# Altium PCB PCB1.PcbDoc
Units mil, origin at the board's own origin, x right, y up, seen from the top; angles counter-clockwise.
Board outline 3310.03 x 3160.01 mil, 2 copper layers (Top Layer, Bottom Layer); 14 components, 68 nets, 167 pads, 0 vias.
Unrouted connection lines stored in the file: 27.
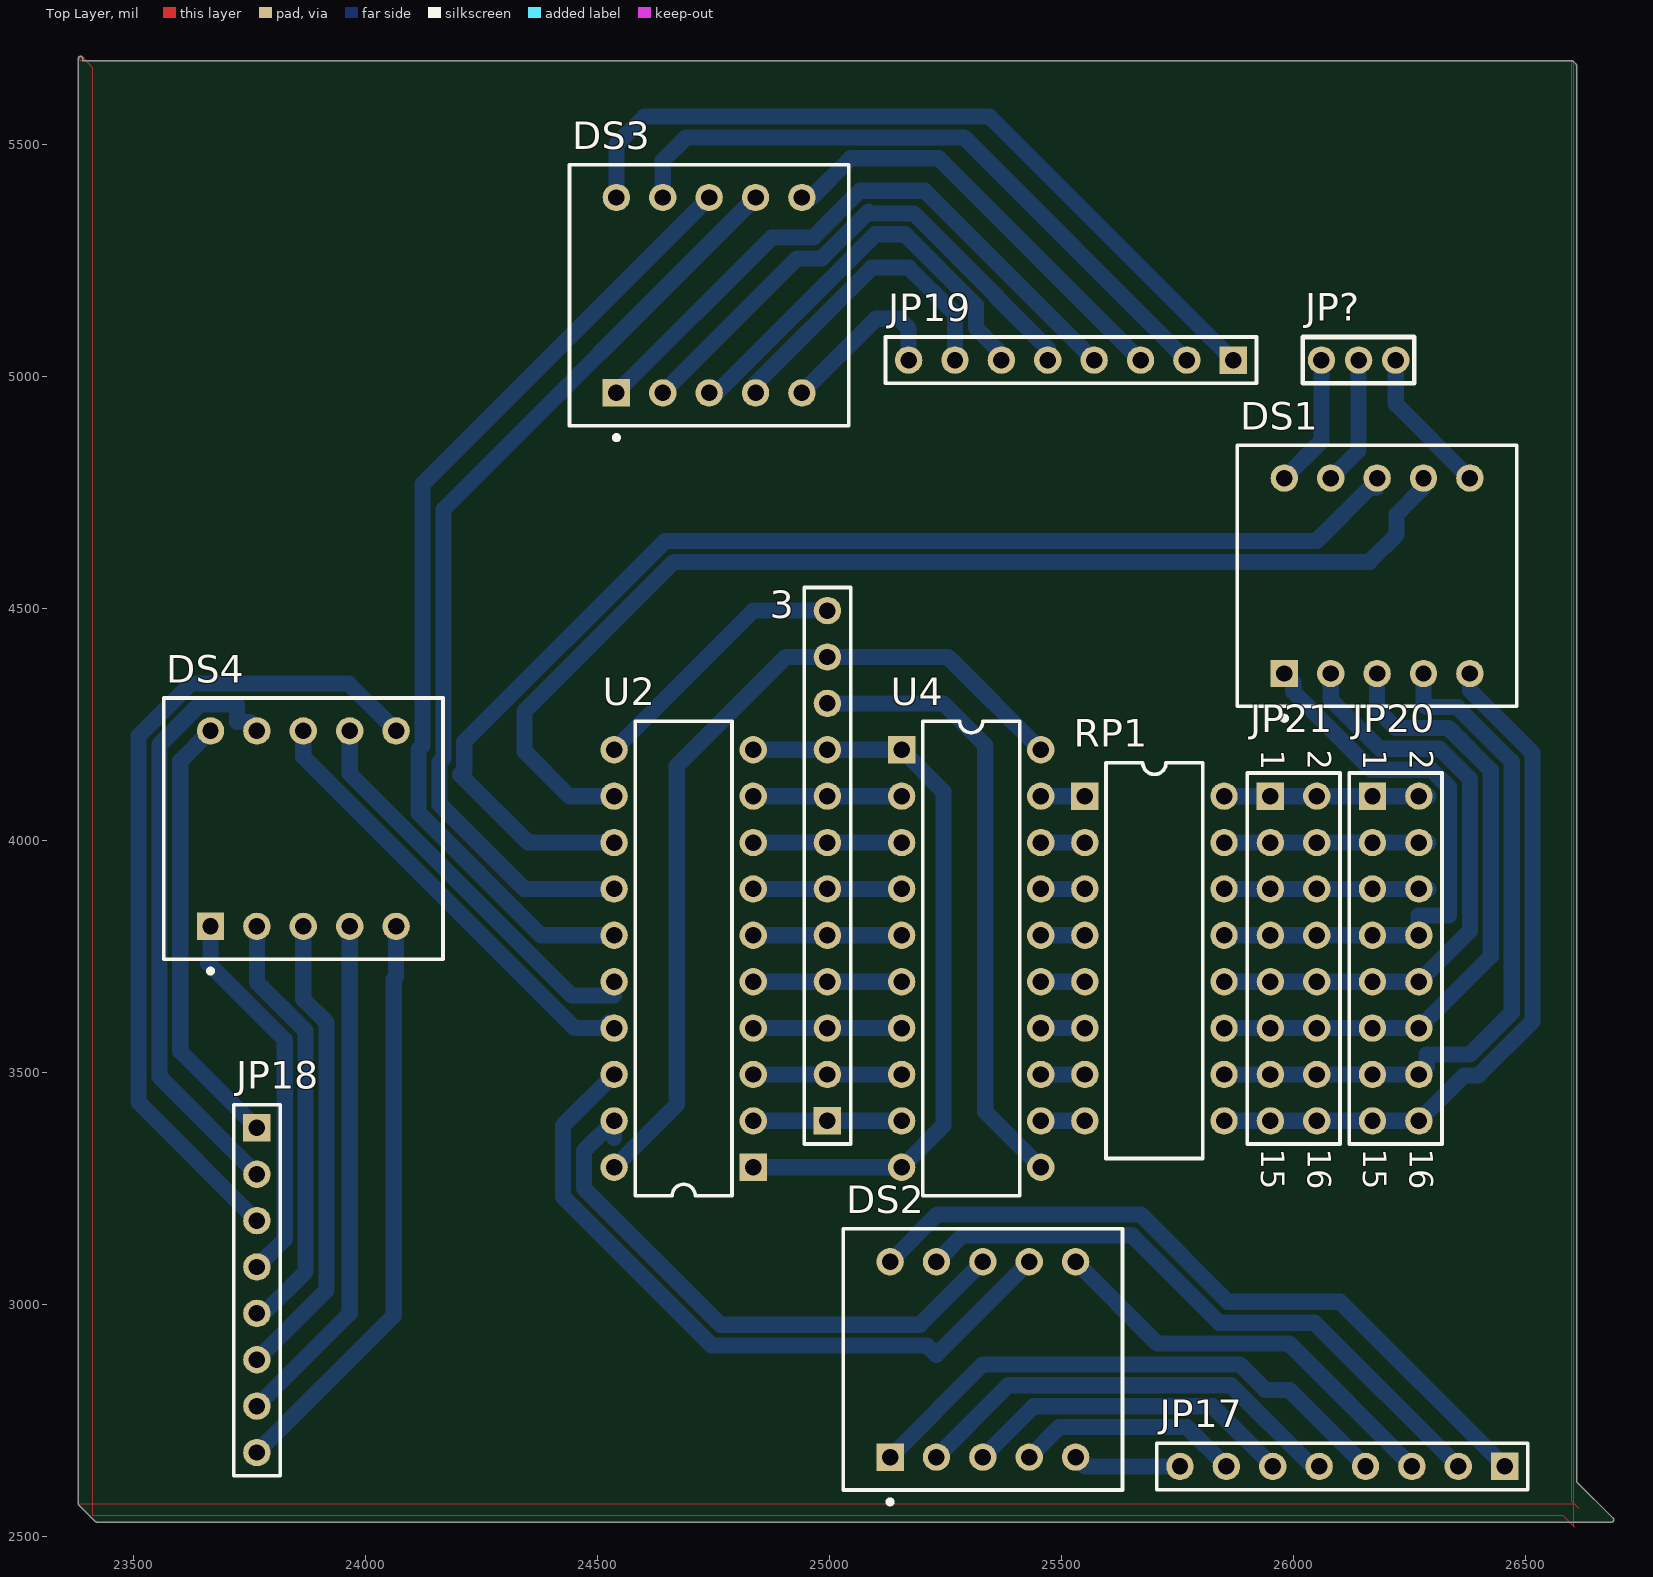
[diagram p0: Top Layer view]
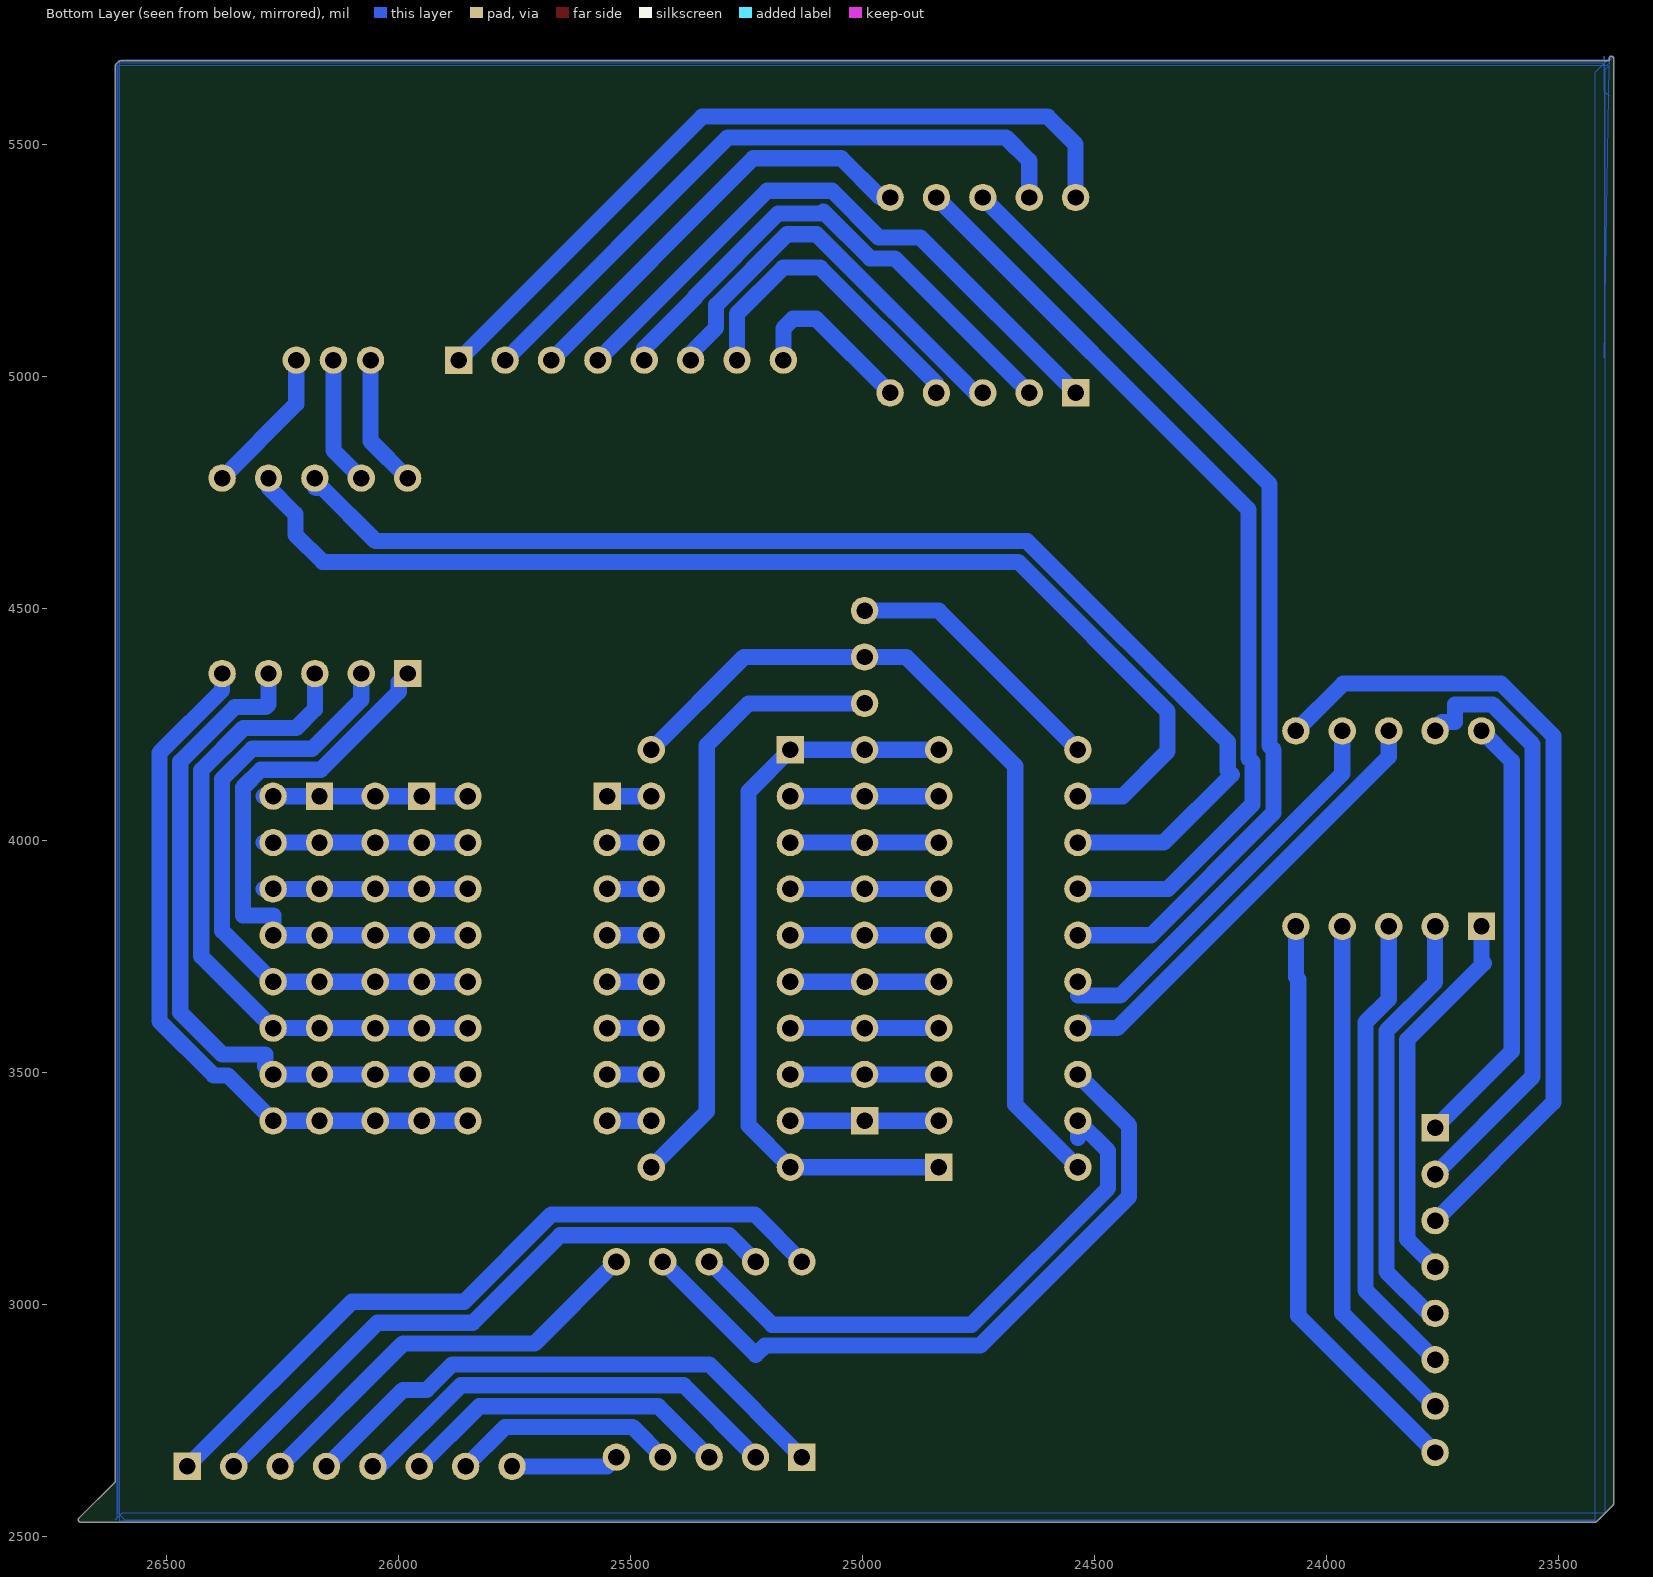
[diagram p1: Bottom Layer view, seen from below]

## Layer stack, top to bottom
Top Solder: solder mask 0.4, Solder Resist, Dk 3.5
Top Layer: signal copper 1.4
Dielectric 1: dielectric 12.6, FR-4, Dk 4.8
Bottom Layer: signal copper 1.4
Bottom Solder: solder mask 0.4, Solder Resist, Dk 3.5

## Board outline
23379.99,2570 ccw(c23385,2570) 23381.47,2566.44 23381.45,2566.45 23416.45,2531.45 23416.44,2531.47 ccw(c23420,2535) 23420,2529.99 26685,2529.99 ccw(c26685,2535) 26690.01,2535 ccw(c26685,2535) 26688.53,2538.56 26688.55,2538.55 26610.01,2617.08 26610.01,5670 ccw(c26605,5670) 26608.53,5673.56 26608.55,5673.55 26603.55,5678.55 26603.56,5678.53 ccw(c26600,5675) 26600,5680.02 23390.01,5680.02 23390.01,5685 ccw(c23385,5685) 23379.99,5685

## Design rules (kind name [scope] priority, off if disabled: settings)
Clearance [All] p1: gap=10
PolygonConnect [All] p1: connectstyle=Relief reliefconductorwidth=10 reliefentries=4 polygonreliefangle="90 Angle" airgapwidth=10
RoutingVias [All] p1: holewidth=28 width=50 viastyle="Through Hole" minholewidth=28 minwidth=50 maxholewidth=28 maxwidth=50
SolderMaskExpansion [All] p1: expansion=4
Width [All] p1: maxlimit=50 minlimit=35 preferedwidth=40
30 further rules are at their usual default settings.

## Components (designator, comment, footprint, x,y, rotation, side; value= is the part's Value field where it differs from the comment)
3 "HEADER 12" HDR1X12 24995,3395 r90 top
DS1 "HDSM-577G" HDSM-577 26180,4570 r0 top
DS2 "HDSM-577G" HDSM-577 25330,2880.63 r0 top
DS3 "HDSM-577G" HDSM-577 24740,5175 r0 top
DS4 "HDSM-577G" HDSM-577 23865,4025 r0 top
JP17 "HEADER 8" HDR1X8 26455,2650 r180 top
JP18 "HEADER 8" HDR1X8 23765,3380 r270 top
JP19 "HEADER 8" HDR1X8 25870,5035 r180 top
JP20 "HEADER 8X2" HDR2X8 26170,4095 r270 top
JP21 "HEADER 8X2" HDR2X8 25950,4095 r270 top
JP? "HEADER 3" "Header3 80mil" 26060,5035 r0 top
RP1 "RESPACK4" DIP16 25700,3745 r270 top
U2 "74HC573" DIP-20 24685,3745 r90 top
U4 "74HC573" DIP-20 25305,3745 r270 top

## Footprints (in the part's own frame and the unit in brackets; to place one, negate y for a bottom-side part, rotate by r counter-clockwise, add the part's x,y. Pads: shape width x height; smd on the part's side, far side on the other; paste and mask are expansions set on the pad)
DIP16 [mm]
  rect 1.5x1.5 hole 0.9: 1(-8.89,-3.81)
  round 1.5 hole 0.9: 2(-6.35,-3.81) 3(-3.81,-3.81) 4(-1.27,-3.81) 5(1.27,-3.81) 6(3.81,-3.81) 7(6.35,-3.81) 8(8.89,-3.81) 9(8.89,3.81) 10(6.35,3.81) 11(3.81,3.81) 12(1.27,3.81) 13(-1.27,3.81) 14(-3.81,3.81) 15(-6.35,3.81) 16(-8.89,3.81)
  silkscreen extent -10.72,-2.65 10.95,2.65
DIP-20 [mm]
  rect 1.5x1.5 hole 0.9: 1(-11.43,-3.81)
  round 1.5 hole 0.9: 2(-8.89,-3.81) 3(-6.35,-3.81) 4(-3.81,-3.81) 5(-1.27,-3.81) 6(1.27,-3.81) 7(3.81,-3.81) 8(6.35,-3.81) 9(8.89,-3.81) 10(11.43,-3.81) 11(11.43,3.81) 12(8.89,3.81) 13(6.35,3.81) 14(3.81,3.81) 15(1.27,3.81) 16(-1.27,3.81) 17(-3.81,3.81) 18(-6.35,3.81) 19(-8.89,3.81) 20(-11.43,3.81)
  silkscreen extent -13,-2.65 13,2.65
HDR1X8 [mm] "Connector; Header; 8 Position"
  rect 1.5x1.5 hole 0.9: 1(0,0)
  round 1.5 hole 0.9: 2(2.54,0) 3(5.08,0) 4(7.62,0) 5(10.16,0) 6(12.7,0) 7(15.24,0) 8(17.78,0)
  silkscreen extent -1.27,-1.27 19.05,1.27
HDR1X12 [mm] "Connector; Header; 12 Position"
  rect 1.5x1.5 hole 0.9: 1(0,0)
  round 1.5 hole 0.9: 2(2.54,0) 3(5.08,0) 4(7.62,0) 5(10.16,0) 6(12.7,0) 7(15.24,0) 8(17.78,0) 9(20.32,0) 10(22.86,0) 11(25.4,0) 12(27.94,0)
  silkscreen extent -1.27,-1.27 29.21,1.27
HDR2X8 [mm] "Connector; Header; 8x2 Position"
  rect 1.5x1.5 hole 0.9: 1(0,0)
  round 1.5 hole 0.9: 2(0,2.54) 3(2.54,0) 4(2.54,2.54) 5(5.08,0) 6(5.08,2.54) 7(7.62,0) 8(7.62,2.54) 9(10.16,0) 10(10.16,2.54) 11(12.7,0) 12(12.7,2.54) 13(15.24,0) 14(15.24,2.54) 15(17.78,0) 16(17.78,2.54)
  silkscreen extent -1.27,-1.27 19.05,3.81
HDSM-577 [mm] "LED, 7-Segment Display, 9.2 mm, Dual Digit; 10 Leads; Row Space 10.7 mm; Pitch 2.54 mm"
  rect 1.5x1.5 hole 0.9: 1(-5.08,-5.35)
  round 1.5 hole 0.9: 2(-2.54,-5.35) 3(0,-5.35) 4(2.54,-5.35) 5(5.08,-5.35) 6(5.08,5.35) 7(2.54,5.35) 8(0,5.35) 9(-2.54,5.35) 10(-5.08,5.35)
  silkscreen extent -7.65,-7.92 7.65,7.15
"Header3 80mil" [mm]
  round 1.5 hole 0.9: 1(0,0) 2(2.032,0) 3(4.064,0)
  silkscreen extent -1.02,-1.27 5.08,1.27

## Part data
3: "12 Pin Header"
DS1 DS2 DS3 DS4: "9.2 mm Green 7-Segment Display: 2-Digit, RH DP"
JP17 JP18 JP19: "8 Pin Header"
RP1: library part 8单路阻排

## Nets (pads, with @x,y where several pads share a name; then routed paths per layer and width w, separated by ;. In a path a pad name is that pad's centre, name@x,y a point inside that pad or via, vN(x,y) a via of type N, cw(c..) or ccw(c..) an arc to the next point about the centre after c; other vN are vias at no path point)
A: DS1.10 DS2.10 DS3.10 DS4.10 JP17.1 JP18.1 JP19.1 JP20.1 JP20.2 JP21.1 JP21.2 JP?.1 RP1.16 | length 4957.4
  Bottom Layer w35: DS4.10 23600,4170.63 23600,3545 JP18.1 ; DS3.10 24540,5500 24600,5560 25345,5560 JP19.1 ; DS2.10 25232.03,3193.29 25669.96,3193.29 25858.25,3005 26100,3005 JP17.1 ; RP1.16 JP20.2@26290,4095 ; DS1.10 26060,4860.63 JP?.1
B: DS1.9 DS2.9 DS3.9 DS4.9 JP17.2 JP18.2 JP19.2 JP20.3 JP20.4 JP21.3 JP21.4 JP?.2 RP1.15 | length 4810.4
  Bottom Layer w35: JP18.2 23555,3490 23555,4206.28 23641.38,4292.66 23722.03,4292.66 23722.03,4255 23750,4255 23765,4240 DS4.9 ; DS3.9 24640,5465 24690,5515 25290,5515 JP19.2 ; DS2.9 25287.03,3148.29 25651.32,3148.29 25839.61,2960 26045,2960 JP17.2 ; RP1.15 JP20.4@26290,3995 ; DS1.9 26140,4840.63 JP?.2
BL1: 
BL2: 
BL3: 
BL4: 
BL5: 
BL6: 
BL7: 
BL8: 
C: DS1.1 DS2.1 DS3.1 DS4.1 JP17.4 JP18.4 JP19.4 JP20.7 JP20.8 JP21.7 JP21.8 RP1.13 | length 4855.6
  Bottom Layer w35: DS4.1 23665,3740 23660,3735 23825,3570 23825,3140 JP18.4 ; DS3.1 24875,5299.37 24964.37,5299.37 25065,5400 25205,5400 JP19.4 ; DS2.1@25130,2670.63 DS2.1 25330,2870 25883.64,2870 25938.64,2815 25990,2815 JP17.4 ; JP21.7 RP1.13 ; JP21.7@25960,3795 RP1.13 ; DS1.1@25999.37,4340 25999.37,4320 26167.34,4152.03 26296.61,4152.03 26335,4113.64 26335,3837.97 26270,3837.97 JP20.8 JP20.7 JP21.8@26060,3795 ; JP21.8 JP21.8@26060,3795 ; RP1.13 JP21.8@26060,3795
D: DS1.3 DS2.3 DS3.3 DS4.3 JP17.6 JP18.6 JP19.6 JP20.11 JP20.12 JP21.11 JP21.12 RP1.11 | length 4385
  Bottom Layer w35: JP18.6 23915,3030 23915,3607.28 23865,3657.28 DS4.3 ; DS3.3 24756.65,4964.37 25098.64,5306.36 25162.28,5306.36 25315,5153.64 25315,5105 25370,5050 JP19.6 ; DS2.3 25440,2780 25825,2780 JP17.6 ; JP21.11@25960,3595 RP1.11 ; JP21.12@26060,3595 RP1.11 ; DS1.3@26175,4360 26175.63,4359.37 DS1.3 ; DS1.3@26180,4339.37 26180,4282.03 26220,4242.03 26333.89,4242.03 26425,4150.92 26425,3750 JP20.12 RP1.11
D0: 3.1 U2.2 U4.9 | length 320
  Bottom Layer w35: U2.2 3.1 U4.9
D1: 3.2 U2.3 U4.8 | length 320
  Bottom Layer w35: U2.3 3.2 U4.8
D2: 3.3 U2.4 U4.7 | length 320
  Bottom Layer w35: U2.4 3.3 U4.7
D3: 3.4 U2.5 U4.6 | length 320
  Bottom Layer w35: U2.5 3.4 U4.6
D4: 3.5 U2.6 U4.5 | length 320
  Bottom Layer w35: U2.6 3.5 U4.5
D5: 3.6 U2.7 U4.4 | length 320
  Bottom Layer w35: U2.7 3.6 U4.4
D6: 3.7 U2.8 U4.3 | length 320
  Bottom Layer w35: U2.8 3.7 U4.3
D7: 3.8 U2.9 U4.2 | length 320
  Bottom Layer w35: U2.9 3.8 U4.2
DU: 3.10 U4.11 | length 1337
  Bottom Layer w35: 3.10 25245,4295 25335,4205 25335,3415 U4.11
E: DS1.2 DS2.2 DS3.2 DS4.2 JP17.5 JP18.5 JP19.5 JP20.9 JP20.10 JP21.9 JP21.10 RP1.12 | length 4666.5
  Bottom Layer w35: JP18.5 23780,2980 23870,3070 23870,3588.64 23765,3693.64 DS4.2 ; DS3.2 24930,5254.37 24983.01,5254.37 25083.64,5355 25087.28,5351.36 25180.92,5351.36 25360,5172.28 25360,5170 25470,5060 JP19.5 ; DS2.2 25385,2825 25865,2825 26040,2650 JP17.5 ; JP21.9@25960,3695 RP1.12 ; JP21.10@26060,3695 RP1.12 ; DS1.2@26080,4339.37 26080,4303.01 26185.98,4197.03 26315.25,4197.03 26380,4132.28 26380,3805 JP20.10 RP1.12 ; DS1.2@26080,4355 DS1.2
EA: 3.11 U2.20 U4.20 | length 1886.1
  Bottom Layer w35: U2.20 24670,3430 24670,4160 24905,4395 3.11 25255,4395 U4.20
F: DS1.6 DS2.6 DS3.6 DS4.6 JP17.3 JP18.3 JP19.3 JP20.5 JP20.6 JP21.5 JP21.6 JP?.3 RP1.14 | length 4408.1
  Bottom Layer w35: JP18.3 23510,3435 23510,4224.92 23622.74,4337.66 23962.97,4337.66 DS4.6 ; DS3.6 24960.63,5385.63 25045,5470 25235,5470 JP19.3 ; DS2.6 25706.26,2915 25990,2915 JP17.3 ; RP1.14 JP20.6@26290,3895 ; JP?.3 26220,4940.63 DS1.6
G: DS1.4 DS2.4 DS3.4 DS4.4 JP17.7 JP18.7 JP19.7 JP20.13 JP20.14 JP21.13 JP21.14 RP1.10 | length 4158.2
  Bottom Layer w35: JP18.7 23965,2980 DS4.4 ; DS3.4 24840,4984.08 25090.46,5234.54 25170.46,5234.54 25270,5135 JP19.7 ; DS2.4 25495,2735 25770,2735 JP17.7 ; JP21.13@25960,3495 RP1.10 ; JP21.14@26060,3495 RP1.10 ; DS1.4 26280,4292.86 26285.84,4287.03 26352.53,4287.03 26470,4169.56 26470,3628.49 26379.48,3537.97 26287.03,3537.97 26287.03,3512.03 JP20.14 RP1.10
GND: 3.9 U2.1 U2.10 U4.1 U4.10 | length 1614.6
  Bottom Layer w35: U2.1 U4.10 25245,3385 25245,4105 U4.1 3.9 U2.10
H: DS1.5 DS2.5 DS3.5 DS4.5 JP17.8 JP18.8 JP19.8 JP20.15 JP20.16 JP21.15 JP21.16 RP1.9 | length 3424.5
  Bottom Layer w35: JP18.8 24060,2975 24060,3700 24065,3705 DS4.5 ; DS3.5 25099.78,5124.15 25149.15,5124.15 25170,5103.3 JP19.8 ; DS2.5 25550,2650 JP17.8 ; RP1.9 JP20.16 26367.97,3492.97 26398.12,3492.97 26515,3609.85 26515,4188.2 26380,4323.2 DS1.5
NBL6: 
Net1_21: 
NetC1_1: 
NetRP1_1: RP1.1 U4.19 | length 95
  Bottom Layer w35: U4.19 RP1.1
NetRP1_2: RP1.2 U4.18 | length 95
  Bottom Layer w35: U4.18 RP1.2
NetRP1_3: RP1.3 U4.17 | length 95
  Bottom Layer w35: U4.17 RP1.3
NetRP1_4: RP1.4 U4.16 | length 95
  Bottom Layer w35: U4.16 RP1.4
NetRP1_5: RP1.5 U4.15 | length 95
  Bottom Layer w35: U4.15 RP1.5
NetRP1_6: RP1.6 U4.14 | length 95
  Bottom Layer w35: U4.14 RP1.6
NetRP1_7: RP1.7 U4.13 | length 95
  Bottom Layer w35: U4.13 RP1.7
NetRP1_8: RP1.8 U4.12 | length 95
  Bottom Layer w35: U4.12 RP1.8
P10: 
P11: 
P12: 
P13: 
P14: 
P15: 
P16: 
P17: 
RE1: 
RE2: 
RE3: 
RE4: 
RE5: 
RE6: 
RE7: 
RE8: 
RST: 
WE: 3.12 U2.11 | length 584.3
  Bottom Layer w35: U2.11 24835,4495 3.12
WE1: DS2.8 U2.19 | length 1246.4
  Bottom Layer w35: 24535,3358.64 U2.19 24470,3330 24470,3250 24764.37,2955.63 25194.37,2955.63 DS2.8
WE2: DS2.7 U2.18 | length 1538.4
  Bottom Layer w35: U2.18 24425,3385 24425,3231.36 24745.73,2910.63 25209.37,2910.63 25229.37,2890.63 DS2.7
WE3: DS4.8 U2.17 | length 985
  Bottom Layer w35: DS4.8 23865,4180 24450,3595 U2.17 U2.17@24522.97,3607.03
WE4: DS4.7 U2.16 | length 860.9
  Bottom Layer w35: DS4.7 23965,4143.64 24443.64,3665 24535,3665 ; U2.16@24535,3694.37 U2.16
WE5: DS3.8 U2.15 | length 2117
  Bottom Layer w35: U2.15 24377.28,3795 24113.64,4058.64 24113.64,4195.23 24122.03,4203.62 24122.03,4767.66 DS3.8
WE6: DS3.7 U2.14 | length 2044.4
  Bottom Layer w35: U2.14@24533.64,3893.64 U2.14 24340.92,3895 24158.64,4077.28 24158.64,4168.2 24167.03,4176.59 24167.03,4712.66 DS3.7
WE7: DS1.8 U2.13 | length 2651.7
  Bottom Layer w35: U2.13 24349.82,3995 24203.64,4141.18 24212.03,4149.57 24212.03,4212.03 24645,4645 26049.37,4645 DS1.8@26165,4760.63 ; DS1.8@26176.26,4760 26175.63,4760.63 DS1.8@26180,4760.63
WE8: DS1.7 U2.12 | length 2486.4
  Bottom Layer w35: U2.12@24535,4097.97 U2.12 24438.64,4095 24341.82,4191.82 24341.82,4278.18 24663.64,4600 26163.43,4600 26222.03,4658.6 26222.03,4702.66 DS1.7@26280,4760.63
WEBF: 
WELR: 
XTAL1: 
XTAL2: 

## Polygon pours and split planes (outlines as drawn)
no net on Bottom Layer "Top Layer-No Net" (solid, remove dead copper, pour order 10): 23380.57,5686.92 23380.57,2566.87 23410.56,2536.89 23415.54,2531.9 26600.56,2531.9 26600.56,5679.29 26596.75,5683.1 23387.09,5683.1 23380.78,5689.41
no net on Bottom Layer "Top Layer-No Net" (solid, remove dead copper, pour order 8): 23390,5670 23398.81,5661.19 23398.81,2548.81 26596.19,2548.81 26610,2535 26606.19,2538.81 26606.19,5676.19 23406.19,5676.19 23400,5670 23400,5615 23390,5605 23400,5615 23400,5690 23400,5685 23400,5040
no net on Bottom Layer "Top Layer-No Net" (solid, remove dead copper, pour order 2): 23390,5675 23395,5670 26605,5670 26605,2550 26590,2535 23420,2535 23420,5655.43 23390.43,5685
no net on Top Layer "Top Layer-No Net" (solid, remove dead copper, pour order 6): 23386.92,5689.63 23379.57,5682.29 23379.57,2570 26605,2570 26615,2560 26600,2575 26600,5680.02 23384.97,5680.02 23379.98,5685
no net on Top Layer "Top Layer-No Net" (solid, remove dead copper, pour order 4): 23386.92,5689.63 23410,5666.55 23410,2545 26580,2545 26605,2520 26603.84,2521.16 26603.84,5678.84 23386.15,5678.84 23379.98,5685

## Text inside footprints (layer, text, board x,y; h text height)
JP20: Top Overlay "2" at 26250,4195 h50 r270; Top Overlay "1" at 26150,4195 h50 r270; Top Overlay "15" at 26150,3335 h50 r270; Top Overlay "16" at 26250,3335 h50 r270
JP21: Top Overlay "2" at 26030,4195 h50 r270; Top Overlay "1" at 25930,4195 h50 r270; Top Overlay "15" at 25930,3335 h50 r270; Top Overlay "16" at 26030,3335 h50 r270